# Altium PCB DB25-relay-HV-control.PcbDoc
Units mil, origin at the board's own origin, x right, y up, seen from the top; angles counter-clockwise.
Board outline 3100 x 2800 mil, 2 copper layers (Top Layer, Bottom Layer); 55 components, 50 nets, 198 pads, 0 vias.
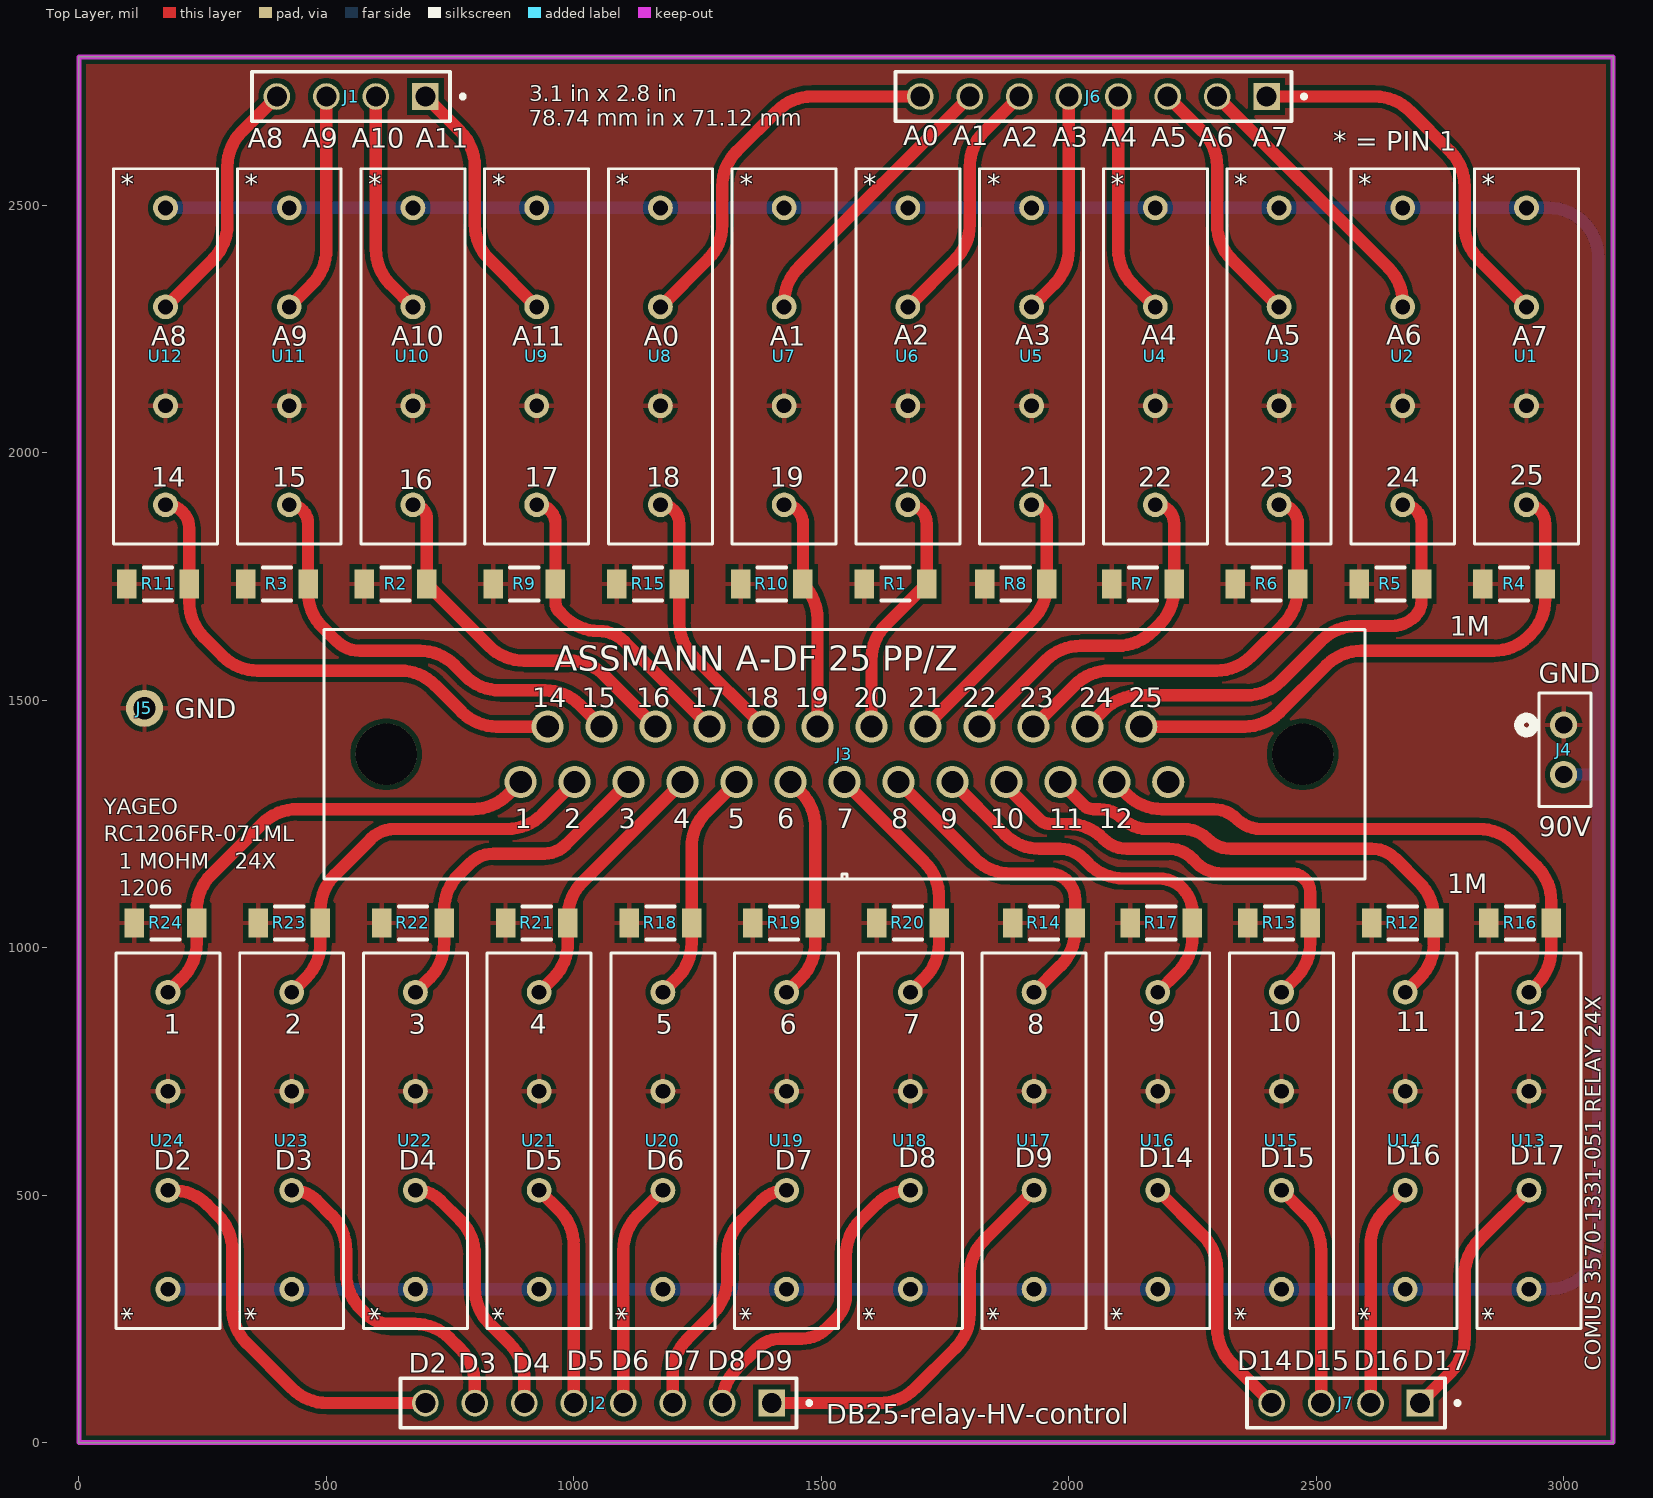
[diagram p0: Top Layer view]
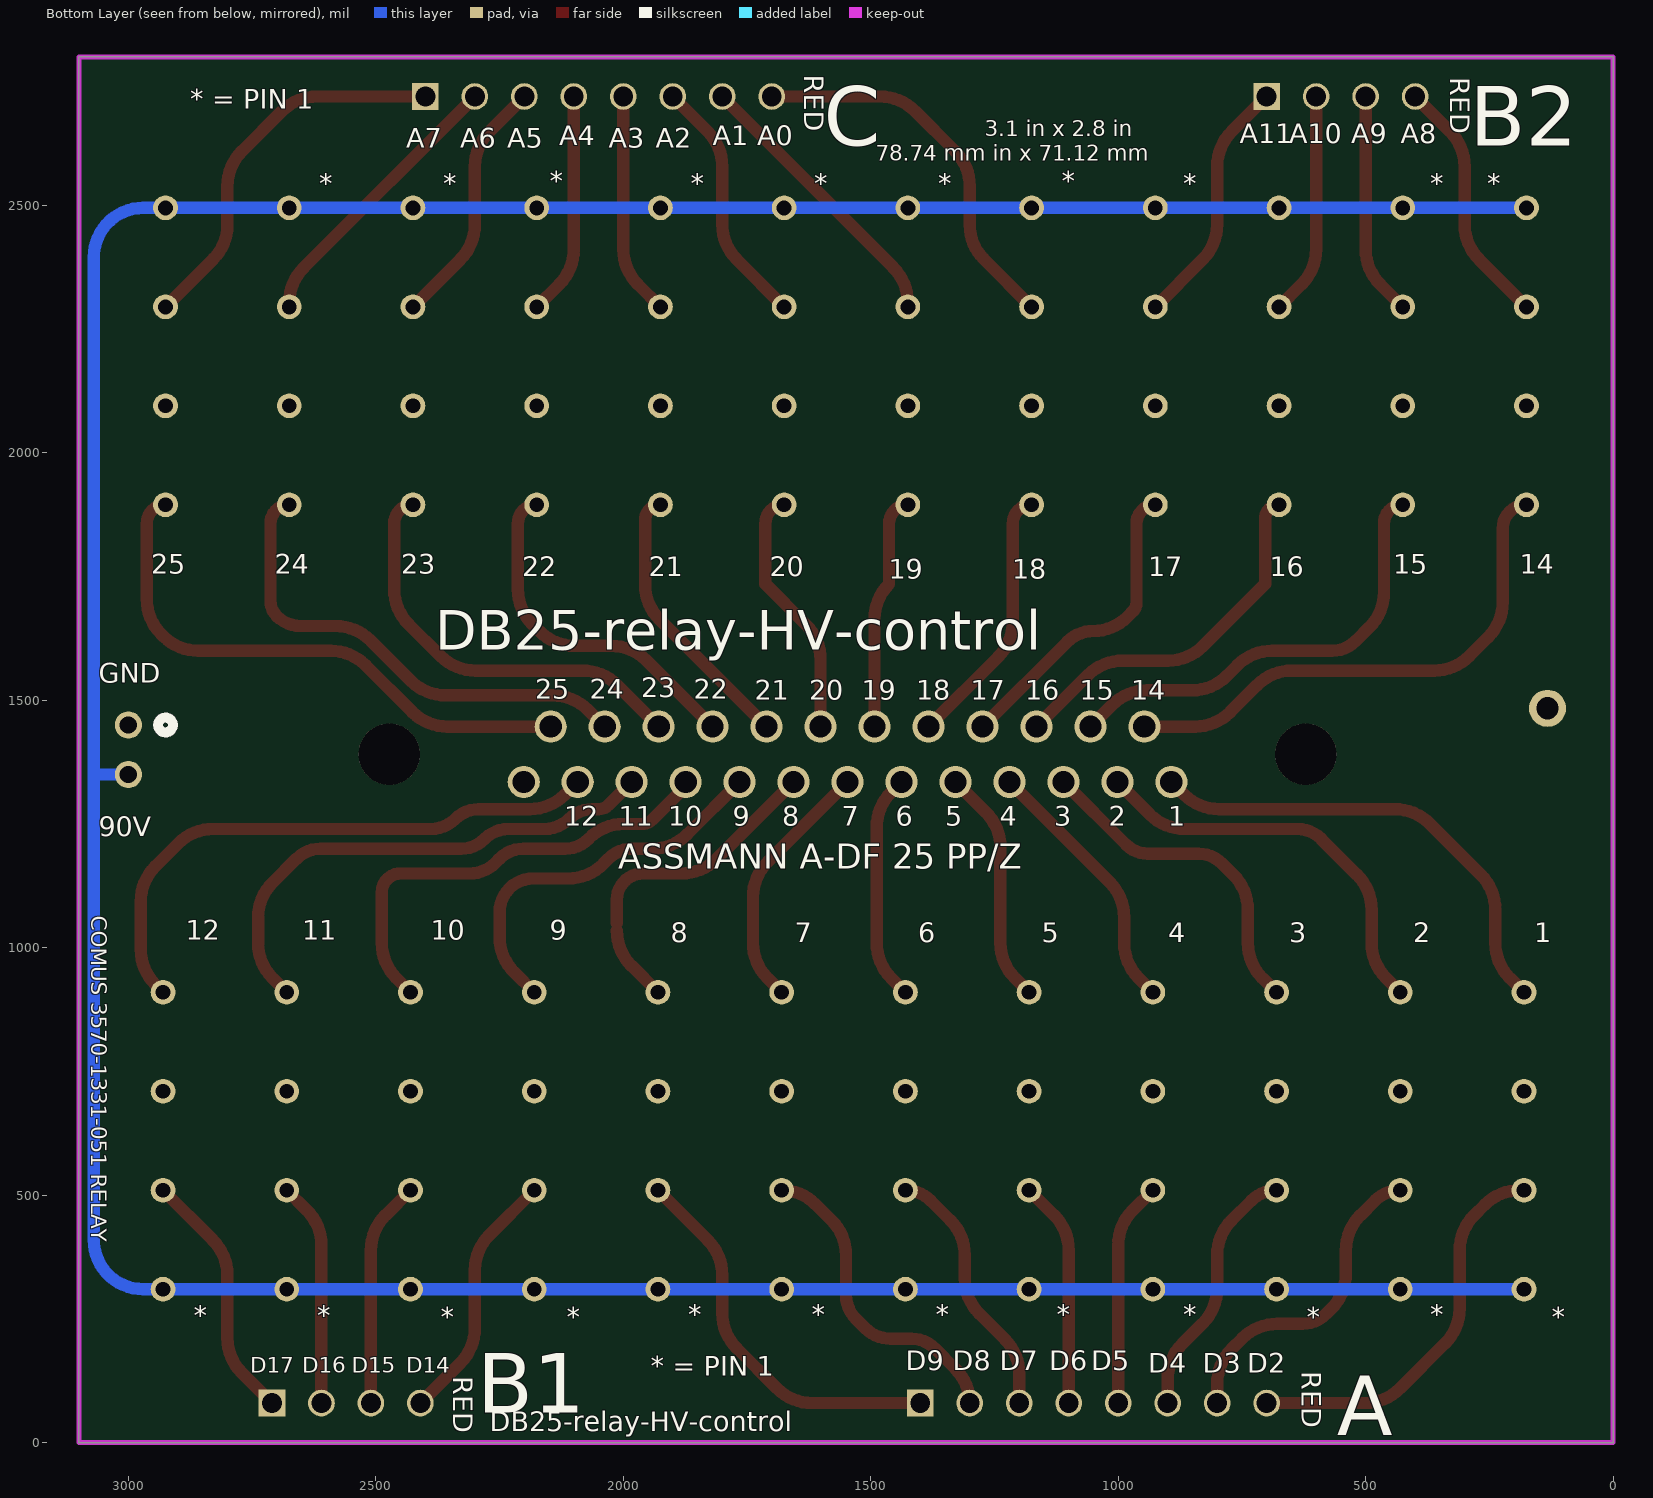
[diagram p1: Bottom Layer view, seen from below]
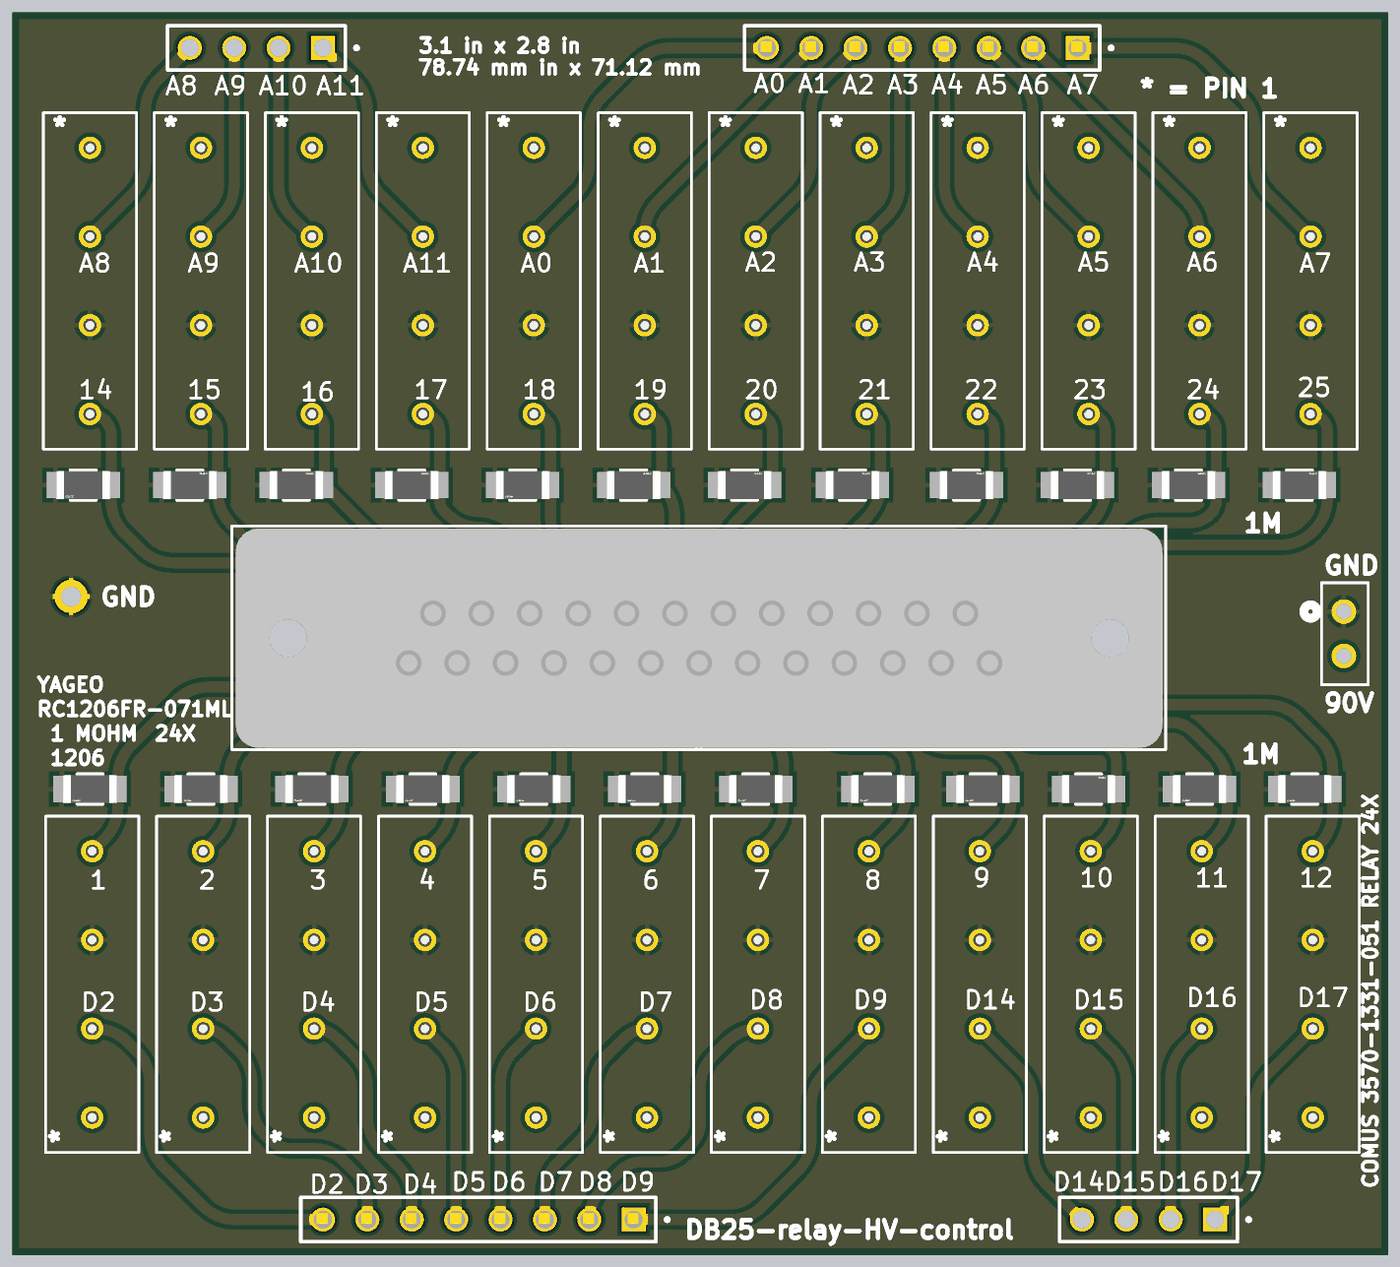
[diagram p2: 3D render of the assembled board from above, using the file's embedded part models]

## Layer stack, top to bottom
Top Solder: solder mask 0.4, Solder Resist, Dk 3.5
Top Layer: signal copper 1.4
Dielectric 1: dielectric 12.6, FR-4, Dk 4.8
Bottom Layer: signal copper 1.4
Bottom Solder: solder mask 0.4, Solder Resist, Dk 3.5

## Board outline
0,0 0,2800 3100,2800 3100,0

## Design rules (kind name [scope] priority, off if disabled: settings)
Clearance [All] p1: gap=10 ignorepadtopadclearanceinfootprint=FALSE
PolygonConnect [All] p1: connectstyle=Relief reliefconductorwidth=10 reliefentries=4 polygonreliefangle="90 Angle" airgapwidth=10
RoutingVias [All] p1: holewidth=28 width=50 viastyle="Through Hole" minholewidth=28 minwidth=50 maxholewidth=28 maxwidth=50
SolderMaskExpansion [All] p1: expansion=4 istentingtop=FALSE
Width [All] p1: maxlimit=30 minlimit=10 preferedwidth=25 minimp=50.000000 maximp=50.000000 favimp=50.000000
30 further rules are at their usual default settings.

## Components (designator, comment, footprint, x,y, rotation, side; value= is the part's Value field where it differs from the comment)
J1 "TSW-104-07-G-S" SAMTEC_TSW-104-07-G-S 550,2720 r180 top
J2 "TSW-108-07-G-S" SAMTEC_TSW-108-07-G-S 1050,80 r180 top
J3 "A-DF 25 PP/Z" "CONN_A-DF 25 PPZ_ASM" 892.56,1335 r180 top
J4 "TSW-102-07-G-S" CON2_1X2_TU_TSW 3000,1400 r270 top
J5 "Single Pin" "Single PC Pin" 132.5,1483.75 r0 top
J6 "TSW-108-07-G-S" SAMTEC_TSW-108-07-G-S 2050,2720 r180 top
J7 "TSW-104-07-G-S" SAMTEC_TSW-104-07-G-S 2560,80 r180 top
R1 "RC1206JR-070RL" FP-RC1206-MFG 1650,1735 r0 top value=0Ω
R2 "RC1206JR-070RL" FP-RC1206-MFG 640,1735 r0 top value=0Ω
R3 "RC1206JR-070RL" FP-RC1206-MFG 400,1735 r0 top value=0Ω
R4 "RC1206JR-070RL" FP-RC1206-MFG 2900,1735 r0 top value=0Ω
R5 "RC1206JR-070RL" FP-RC1206-MFG 2650,1735 r0 top value=0Ω
R6 "RC1206JR-070RL" FP-RC1206-MFG 2400,1735 r0 top value=0Ω
R7 "RC1206JR-070RL" FP-RC1206-MFG 2150,1735 r0 top value=0Ω
R8 "RC1206JR-070RL" FP-RC1206-MFG 1892.99,1735 r0 top value=0Ω
R9 "RC1206JR-070RL" FP-RC1206-MFG 900,1735 r0 top value=0Ω
R10 "RC1206JR-070RL" FP-RC1206-MFG 1400,1735 r0 top value=0Ω
R11 "RC1206JR-070RL" FP-RC1206-MFG 160,1735 r180 top value=0Ω
R12 "RC1206JR-070RL" FP-RC1206-MFG 2675,1050 r180 top value=0Ω
R13 "RC1206JR-070RL" FP-RC1206-MFG 2425,1050 r0 top value=0Ω
R14 "RC1206JR-070RL" FP-RC1206-MFG 1950,1050 r180 top value=0Ω
R15 "RC1206JR-070RL" FP-RC1206-MFG 1150,1735 r180 top value=0Ω
R16 "RC1206JR-070RL" FP-RC1206-MFG 2912.01,1050 r180 top value=0Ω
R17 "RC1206JR-070RL" FP-RC1206-MFG 2187.01,1050 r180 top value=0Ω
R18 "RC1206JR-070RL" FP-RC1206-MFG 1175,1050 r180 top value=0Ω
R19 "RC1206JR-070RL" FP-RC1206-MFG 1425,1050 r180 top value=0Ω
R20 "RC1206JR-070RL" FP-RC1206-MFG 1675,1050 r180 top value=0Ω
R21 "RC1206JR-070RL" FP-RC1206-MFG 925,1050 r180 top value=0Ω
R22 "RC1206JR-070RL" FP-RC1206-MFG 675,1050 r180 top value=0Ω
R23 "RC1206JR-070RL" FP-RC1206-MFG 425,1050 r180 top value=0Ω
R24 "RC1206JR-070RL" FP-RC1206-MFG 175,1050 r180 top value=0Ω
U1 "3570-1331-051" SIP_3570-1331_COM 2925,2495 r270 top
U2 "3570-1331-051" SIP_3570-1331_COM 2675,2495 r270 top
U3 "3570-1331-051" SIP_3570-1331_COM 2425,2495 r270 top
U4 "3570-1331-051" SIP_3570-1331_COM 2175,2495 r270 top
U5 "3570-1331-051" SIP_3570-1331_COM 1925,2495 r270 top
U6 "3570-1331-051" SIP_3570-1331_COM 1675,2495 r270 top
U7 "3570-1331-051" SIP_3570-1331_COM 1425,2495 r270 top
U8 "3570-1331-051" SIP_3570-1331_COM 1175,2495 r270 top
U9 "3570-1331-051" SIP_3570-1331_COM 925,2495 r270 top
U10 "3570-1331-051" SIP_3570-1331_COM 675,2495 r270 top
U11 "3570-1331-051" SIP_3570-1331_COM 425,2495 r270 top
U12 "3570-1331-051" SIP_3570-1331_COM 175,2495 r270 top
U13 "3570-1331-051" SIP_3570-1331_COM 2930,310 r90 top
U14 "3570-1331-051" SIP_3570-1331_COM 2680,310 r90 top
U15 "3570-1331-051" SIP_3570-1331_COM 2430,310 r90 top
U16 "3570-1331-051" SIP_3570-1331_COM 2180,310 r90 top
U17 "3570-1331-051" SIP_3570-1331_COM 1930,310 r90 top
U18 "3570-1331-051" SIP_3570-1331_COM 1680,310 r90 top
U19 "3570-1331-051" SIP_3570-1331_COM 1430,310 r90 top
U20 "3570-1331-051" SIP_3570-1331_COM 1180,310 r90 top
U21 "3570-1331-051" SIP_3570-1331_COM 930,310 r90 top
U22 "3570-1331-051" SIP_3570-1331_COM 680,310 r90 top
U23 "3570-1331-051" SIP_3570-1331_COM 430,310 r90 top
U24 "3570-1331-051" SIP_3570-1331_COM 180,310 r90 top

## Footprints (in the part's own frame and the unit in brackets; to place one, negate y for a bottom-side part, rotate by r counter-clockwise, add the part's x,y. Pads: shape width x height; smd on the part's side, far side on the other; paste and mask are expansions set on the pad)
CON2_1X2_TU_TSW [mil]
  round 55 / inner round 60 / far side round 55 hole 35 paste-99999 mask+0: 1(-50,0) 2(50,0)
  silkscreen extent -115,-90 115,55
"CONN_A-DF 25 PPZ_ASM" [mil]
  round 65 / inner round 60 / far side round 65 hole 45 paste-99999 mask+0: 1(0,0) 2(-109.06,0) 3(-218.11,0) 4(-327.17,0) 5(-436.22,0) 6(-545.28,0) 7(-654.33,0) 8(-763.39,0) 9(-872.44,0) 10(-981.5,0) 11(-1090.55,0) 12(-1199.61,0) 13(-1308.66,0) 14(-54.53,-111.81) 15(-163.58,-111.81) 16(-272.64,-111.81) 17(-381.69,-111.81) 18(-490.75,-111.81) 19(-599.8,-111.81) 20(-708.86,-111.81) 21(-817.91,-111.81) 22(-926.97,-111.81) 23(-1036.02,-111.81) 24(-1145.08,-111.81) 25(-1254.13,-111.81)
  round 124 / inner round 60 / far side round 124 hole 124 unplated paste-99999 mask-62: 26(-1580.32,-55.91) 27(271.65,-55.91)
  silkscreen extent -1706,-308 398,196, body extent -1699,-302 389,192, height 478
FP-RC1206-MFG [mm]
  rect 1x1.5 smd paste+0 mask+0: 1(-1.6,0) 2(1.6,0)
  silkscreen extent -0.72,-0.85 0.72,0.85, body extent -2.2,-0.95 2.2,0.95, height 0.25
SAMTEC_TSW-104-07-G-S [mm]
  rect 1.37x1.37 / inner round 1.37 / far side rect 1.37x1.37 hole 1.02: 01(-3.81,0)
  round 1.37 hole 1.02: 02(-1.27,0) 03(1.27,0) 04(3.81,0)
  silkscreen extent -5.83,-1.27 5.08,1.27
SAMTEC_TSW-108-07-G-S [mm]
  rect 1.37x1.37 / inner round 1.37 / far side rect 1.37x1.37 hole 1.02: 01(-8.89,0)
  round 1.37 hole 1.02: 02(-6.35,0) 03(-3.81,0) 04(-1.27,0) 05(1.27,0) 06(3.81,0) 07(6.35,0) 08(8.89,0)
  silkscreen extent -10.91,-1.27 10.16,1.27, body extent -10.25,-1.34 10.2,1.2, height 1.34
"Single PC Pin" [mil]
  round 75 hole 45: 1(0,0)
SIP_3570-1331_COM [mil]
  round 50 / inner round 60 / far side round 50 hole 30 paste-99999 mask+0: 1(0,0) 2(200,0) 3(400,0) 4(600,0)
  silkscreen extent -79,-105 679,105, body extent -74,-100 674,100, height 130

## Part data
J1 J7: "<a href=\"https://pricing.snapeda.com/parts/TSW-104-07-G-S/Samtec/view-part?ref=eda\">Check availability</a>", Package=None, Availability=Unavailable, MP=altium_native_batch, Price=None
J2 J6: "TSW - Samtec 2.54mm Pin Header 10.92mm Overall Pin Length (07) - Fast Stock", Package=None, Check_prices=https://www.snapeda.com/parts/TSW-108-07-G-S/Samtec+Inc./view-part/?ref=eda, MF="Samtec Inc.", MP=TSW-108-07-G-S, SnapEDA_Link=https://www.snapeda.com/parts/TSW-108-07-G-S/Samtec+Inc./view-part/?ref=snap
J3: library part "A-DF 25 PPZ", "No Description Available", Mfr_Name=Assmann, Copyright="Copyright (C) 2024 Ultra Librarian. All rights reserved.", Manufacturer_Part_Number="A-DF 25 PP/Z", RefDes=RefDes, Type=DEV
J4: "No Description Available", Mfr_Name="Samtec Inc", Copyright="Copyright (C) 2024 Ultra Librarian. All rights reserved.", Manufacturer_Part_Number=TSW-102-07-G-S, RefDes=RefDes, Type=DEV
J5: library part "Single PC Pin", Supplier Part Number 1=575-2617001340000, Supplier 1=Mouser
R1 R2 R3 R4 R5 R6 R7 R8 R9 R10 R11 R12 R13 R14 R15 R16 R17 R18 R19 R20 R21 R22 R23 R24: library part CMP-2100-03681-2, "RES SMD 0 OHM JUMPER 1/4W 1206", Manufacturer=YAGEO, Package=RC1206, Power Rating=0.25W, Resistance=0Ω, Temperature="-55°C to +155°C", Temperature Coefficient=300ppm/°C, Temperature Range High=+155°C, Temperature Range Low=-55°C, Tolerance=5%, Voltage Rating=200V, Automotive=No, Category=Res, ComponentLink2Description=Datasheet, ComponentLink2URL=https://www.yageo.com/upload/media/product/productsearch/datasheet/rchip/PYu-RC_Group_51_RoHS_L_10.pdf, Composition="Thick Film", Device Class L1="Passive Components", Device Class L2=Resistors, Device Class L3="Chip SMD Resistors", Digikey Description="RES SMD 0 OHM JUMPER 1/4W 1206", Footprint Url=https://www.yageo.com/upload/website/yageo_PYu-R_Mount_10_19050818_343.pdf, Height=0.65mm, Ipc Land Pattern Name=RESC310160X55, Lead Free=Yes, Manufacturer Part Number=RC1206JR-070RL, Mouser Description="Resistor: thick film; SMD; 1206; 0O; 0.25W; ±5%; -55÷155°C", Octopart=https://octopart.com/rc1206jr-070rl-yageo-40025601, RoHS=TRUE, Series=RC
U1 U2 U3 U4 U5 U6 U7 U8 U9 U10 U11 U12 U13 U14 U15 U16 U17 U18 U19 U20 U21 U22 U23 U24: "No Description Available", Mfr_Name=Comus, Copyright="Copyright (C) 2024 Ultra Librarian. All rights reserved.", Manufacturer_Part_Number=3570-1331-051, RefDes=RefDes, Type=DEV

## Nets (pads, with @x,y where several pads share a name; then routed paths per layer and width w, separated by ;. In a path a pad name is that pad's centre, name@x,y a point inside that pad or via, vN(x,y) a via of type N, cw(c..) or ccw(c..) an arc to the next point about the centre after c; other vN are vias at no path point)
GND: J4.1 J5.1 R1.1 R2.1 R3.1 R4.1 R5.1 R6.1 R7.1 R8.1 R9.1 R10.1 R11.2 R12.2 R13.1 R14.2 R15.2 R16.2 R17.2 R18.2 R19.2 R20.2 R21.2 R22.2 R23.2 R24.2 U1.3 U2.3 U3.3 U4.3 U5.3 U6.3 U7.3 U8.3 U9.3 U10.3 U11.3 U12.3 U13.3 U14.3 U15.3 U16.3 U17.3 U18.3 U19.3 U20.3 U21.3 U22.3 U23.3 U24.3
NetJ1_01: J1.01 U9.2 | length 509.6
  Top Layer w25: J1.01 770.71,2649.29 cw(c700,2578.58) 800,2578.58 800,2461.42 ccw(c900,2461.42) 829.29,2390.71 U9.2
NetJ1_02: J1.02 U10.2 | length 451.8
  Top Layer w25: J1.02 600,2411.42 ccw(c700,2411.42) 629.29,2340.71 U10.2
NetJ1_03: J1.03 U11.2 | length 451.8
  Top Layer w25: U11.2 470.71,2340.71 ccw(c400,2411.42) 500,2411.42 J1.03
NetJ1_04: J1.04 U12.2 | length 509.6
  Top Layer w25: U12.2 270.71,2390.71 ccw(c200,2461.42) 300,2461.42 300,2578.58 cw(c400,2578.58) 329.29,2649.29 J1.04
NetJ2_01: J2.01 U17.2 | length 788.9
  Top Layer w25: J2.01 1618.58,80 ccw(c1618.58,180) 1689.29,109.29 1770.71,190.71 ccw(c1700,261.42) 1800,261.42 1800,338.58 cw(c1900,338.58) 1829.29,409.29 U17.2
NetJ2_02: J2.02 U18.2 | length 647.8
  Top Layer w25: J2.02 cw(c1396.57,80) 1328.28,148.28 1370,190 cw(c1418.28,141.72) 1418.28,210 1460,210 ccw(c1460,282.43) 1511.21,231.21 1530,250 ccw(c1481.72,298.28) 1550,298.28 1550,378.58 cw(c1650,378.58) 1579.29,449.29 1611.72,481.72 cw(c1680,413.43) U18.2
NetJ2_03: J2.03 U19.2 | length 526.8
  Top Layer w25: J2.03 1200,138.58 cw(c1300,138.58) 1229.29,209.29 1280.71,260.71 ccw(c1210,331.42) 1310,331.42 1310,378.58 cw(c1410,378.58) 1339.29,449.29 1378.79,488.79 cw(c1430,437.57) U19.2
NetJ2_04: J2.04 U20.2 | length 458.8
  Top Layer w25: J2.04 1100,388.58 cw(c1200,388.58) 1129.29,459.29 U20.2
NetJ2_05: J2.05 U21.2 | length 454.7
  Top Layer w25: U21.2 970.71,469.29 cw(c900,398.58) 1000,398.58 J2.05
NetJ2_06: J2.06 U22.2 | length 522.7
  Top Layer w25: U22.2 cw(c680,437.57) 731.21,488.79 770.71,449.29 cw(c700,378.58) 800,378.58 800,311.42 ccw(c900,311.42) 829.29,240.71 870.71,199.29 cw(c800,128.58) 900,128.58 J2.06
NetJ2_07: J2.07 U23.2 | length 647.9
  Top Layer w25: U23.2 cw(c430,437.57) 481.21,488.79 510.71,459.29 cw(c440,388.58) 540,388.58 540,341.42 ccw(c640,341.42) 569.29,270.71 580,260 ccw(c628.28,308.28) 628.28,240 678.58,240 cw(c678.58,140) 749.29,210.71 770.71,189.29 cw(c700,118.58) 800,118.58 J2.07
NetJ2_08: J2.08 U24.2 | length 798.1
  Top Layer w25: U24.2 188.58,510 cw(c188.58,410) 259.29,480.71 280.71,459.29 cw(c210,388.58) 310,388.58 310,271.42 ccw(c410,271.42) 339.29,200.71 430.71,109.29 ccw(c501.42,180) 501.42,80 J2.08
NetJ3_1: J3.1 R24.1 U24.4 | length 959.3
  Top Layer w25: U24.4 208.7,938.7 ccw(c137.99,1009.41) 237.99,1009.41 R24.1 237.99,1076.57 cw(c337.99,1076.57) 267.28,1147.28 370.71,1250.71 cw(c441.42,1180) 441.42,1280 796.14,1280 ccw(c796.14,1380) 866.85,1309.29 J3.1
NetJ3_2: J3.2 R23.1 U23.4 | length 819.7
  Top Layer w25: U23.4 458.7,938.7 ccw(c387.99,1009.41) 487.99,1009.41 R23.1 487.99,1076.57 cw(c587.99,1076.57) 517.28,1147.28 590,1220 cw(c638.28,1171.72) 638.28,1240 865.19,1240 ccw(c865.19,1340) 935.9,1269.29 J3.2
NetJ3_3: J3.3 R22.1 U22.4 | length 680.4
  Top Layer w25: U22.4 708.7,938.7 ccw(c637.99,1009.41) 737.99,1009.41 R22.1 737.99,1076.57 cw(c837.99,1076.57) 767.28,1147.28 790,1170 cw(c838.28,1121.72) 838.28,1190 940,1190 ccw(c940,1251.97) 983.82,1208.15 J3.3
NetJ3_4: J3.4 R21.1 U21.4 | length 536.4
  Top Layer w25: U21.4 958.7,938.7 ccw(c887.99,1009.41) 987.99,1009.41 R21.1 987.99,1061.85 cw(c1087.99,1061.85) 1017.28,1132.56 J3.4
NetJ3_5: J3.5 R18.1 U20.4 | length 478
  Top Layer w25: U20.4 1208.7,938.7 ccw(c1137.99,1009.41) 1237.99,1009.41 R18.1 1237.99,1202.79 cw(c1337.99,1202.79) 1267.28,1273.5 J3.5
NetJ3_6: J3.6 R19.1 U19.4 | length 461.2
  Top Layer w25: U19.4 1458.7,938.7 ccw(c1387.99,1009.41) 1487.99,1009.41 R19.1 1487.99,1243.42 ccw(c1387.99,1243.42) 1458.7,1314.13 J3.6
NetJ3_7: J3.7 R20.1 U18.4 | length 519.6
  Top Layer w25: J3.7 1708.7,1173.19 cw(c1637.99,1102.48) 1737.99,1102.48 R20.1 1737.99,1009.41 cw(c1637.99,1009.41) 1708.7,938.7 U18.4
NetJ3_8: J3.8 R14.1 U17.4 | length 661.1
  Top Layer w25: J3.8 1811.66,1179.29 ccw(c1882.37,1250) 1882.37,1150 1960,1150 cw(c1960,1097.01) 2012.99,1097.01 R14.1 ; U17.4 1983.7,963.7 ccw(c1912.99,1034.41) R14.1@2012.99,1034.41
NetJ3_9: J3.9 R17.1 U16.4 | length 779.6
  Top Layer w25: J3.9 1870.71,1229.29 ccw(c1941.42,1300) 1941.42,1200 1981.72,1200 cw(c1981.72,1131.72) 2030,1180 2040.71,1169.29 ccw(c2111.42,1240) 2111.42,1140 2181.72,1140 cw(c2181.72,1071.72) 2230,1120 cw(c2181.72,1071.72) 2250,1071.72 R17.1 2250,1021.42 cw(c2150,1021.42) 2220.71,950.71 U16.4
NetJ3_10: J3.10 R13.2 U15.4 | length 923.7
  Top Layer w25: J3.10 ccw(c1895.92,1335) 1880.46,1319.54 1940,1260 ccw(c1964.14,1284.14) 1964.14,1250 2000,1250 cw(c2000,1153.43) 2068.28,1221.72 2070,1220 ccw(c2118.28,1268.28) 2118.28,1200 2201.72,1200 cw(c2201.72,1131.72) 2250,1180 2258.79,1171.21 ccw(c2310,1222.43) 2310,1150 2450,1150 cw(c2450,1112.01) 2487.99,1112.01 R13.2 2487.99,1009.41 cw(c2387.99,1009.41) 2458.7,938.7 U15.4
NetJ3_11: J3.11 R12.1 U14.4 | length 1042.9
  Top Layer w25: J3.11 2029.7,1288.41 ccw(c2050,1308.7) 2050,1280 2061.72,1280 cw(c2061.72,1211.72) 2110,1260 ccw(c2158.28,1308.28) 2158.28,1240 2231.72,1240 cw(c2231.72,1171.72) 2280,1220 ccw(c2328.28,1268.28) 2328.28,1200 2611.72,1200 cw(c2611.72,1131.72) 2660,1180 2708.7,1131.3 cw(c2637.99,1060.59) 2737.99,1060.59 R12.1 2737.99,1009.41 cw(c2637.99,1009.41) 2708.7,938.7 U14.4
NetJ3_12: J3.12 R16.1 U13.4 | length 1186.2
  Top Layer w25: J3.12 2117.88,1309.29 ccw(c2188.59,1380) 2188.59,1280 2291.72,1280 cw(c2291.72,1211.72) 2340,1260 ccw(c2388.28,1308.28) 2388.28,1240 2828.58,1240 cw(c2828.58,1140) 2899.29,1210.71 2945.71,1164.29 cw(c2875,1093.58) 2975,1093.58 R16.1 2975,996.42 cw(c2875,996.42) 2945.71,925.71 U13.4
NetJ3_14: J3.14 R11.1 U12.4 | length 1059.3
  Top Layer w25: U12.4 cw(c175,1847.01) 222.99,1847.01 R11.1 222.99,1698.43 ccw(c322.99,1698.43) 252.28,1627.72 290.71,1589.29 ccw(c361.42,1660) 361.42,1560 648.58,1560 cw(c648.58,1460) 719.29,1530.71 773.9,1476.1 ccw(c844.61,1546.81) 844.61,1446.81 J3.14
NetJ3_15: J3.15 R3.2 U11.4 | length 908
  Top Layer w25: U11.4 cw(c425,1857.01) 462.99,1857.01 R3.2 462.99,1718.43 ccw(c562.99,1718.43) 492.28,1647.72 520,1620 ccw(c568.28,1668.28) 568.28,1600 688.58,1600 cw(c688.58,1500) 759.29,1570.71 780.71,1549.29 ccw(c851.42,1620) 851.42,1520 941.53,1520 cw(c941.53,1420) 1012.24,1490.71 J3.15
NetJ3_16: J3.16 R2.2 U10.4 | length 748.9
  Top Layer w25: U10.4 cw(c675,1867.01) 702.99,1867.01 R2.2 828.7,1609.29 ccw(c899.41,1680) 899.41,1580 990.59,1580 cw(c990.59,1480) 1061.3,1550.71 J3.16
NetJ3_17: J3.17 R9.2 U9.4 | length 632
  Top Layer w25: U9.4 cw(c925,1857.01) 962.99,1857.01 R9.2 962.99,1696.92 ccw(c986.92,1696.92) 970,1680 981.72,1668.28 ccw(c1050,1736.57) 1050,1640 cw(c1050,1565.01) 1103.03,1618.04 J3.17
NetJ3_18: J3.18 R15.1 U8.4 | length 536.1
  Top Layer w25: U8.4 cw(c1175,1857.01) 1212.99,1857.01 R15.1 1212.99,1658.55 ccw(c1312.99,1658.55) 1242.28,1587.84 J3.18
NetJ3_19: J3.19 R10.2 U7.4 | length 477.7
  Top Layer w25: U7.4 cw(c1425,1857.01) 1462.99,1857.01 R10.2 1463.07,1734.92 cw(c1392.36,1664.21) 1492.36,1664.21 J3.19
NetJ3_20: J3.20 R1.2 U6.4 | length 511.8
  Top Layer w25: J3.20 1601.42,1582 cw(c1701.42,1582) 1630.71,1652.71 R1.2 1712.99,1857.01 ccw(c1675,1857.01) U6.4
NetJ3_21: J3.21 R8.2 U5.4 | length 563.3
  Top Layer w25: J3.21 1926.69,1663.03 ccw(c1855.98,1733.74) 1955.98,1733.74 R8.2 1955.98,1864.02 ccw(c1925,1864.02) U5.4
NetJ3_22: J3.22 R7.2 U4.4 | length 712.1
  Top Layer w25: J3.22 1953.43,1580.71 cw(c2024.14,1510) 2024.14,1610 2098.58,1610 ccw(c2098.58,1710) 2169.29,1639.29 2183.7,1653.7 ccw(c2112.99,1724.41) 2212.99,1724.41 R7.2 2212.99,1857.01 ccw(c2175,1857.01) U4.4
NetJ3_23: J3.23 R6.2 U3.4 | length 853
  Top Layer w25: J3.23 2012.48,1530.71 cw(c2083.19,1460) 2083.19,1560 2298.58,1560 ccw(c2298.58,1660) 2369.29,1589.29 2433.7,1653.7 ccw(c2362.99,1724.41) 2462.99,1724.41 R6.2 2462.99,1857.01 ccw(c2425,1857.01) U3.4
NetJ3_24: J3.24 R5.2 U2.4 | length 989.1
  Top Layer w25: J3.24 2071.54,1480.71 cw(c2142.25,1410) 2142.25,1510 2358.58,1510 ccw(c2358.58,1610) 2429.29,1539.29 2510.71,1620.71 cw(c2581.42,1550) 2581.42,1650 2651.72,1650 ccw(c2651.72,1718.28) 2700,1670 ccw(c2668.63,1701.37) 2712.99,1701.37 R5.2 2712.99,1857.01 ccw(c2675,1857.01) U2.4
NetJ3_25: J3.25 R4.2 U1.4 | length 1142.3
  Top Layer w25: J3.25 2355.39,1446.81 ccw(c2355.39,1546.81) 2426.1,1476.1 2520.71,1570.71 cw(c2591.42,1500) 2591.42,1600 2858.58,1600 ccw(c2858.58,1700) 2929.29,1629.29 2933.7,1633.7 ccw(c2862.99,1704.41) 2962.99,1704.41 R4.2 2962.99,1857.01 ccw(c2925,1857.01) U1.4
NetJ4_2: J4.2 U1.1 U2.1 U3.1 U4.1 U5.1 U6.1 U7.1 U8.1 U9.1 U10.1 U11.1 U12.1 U13.1 U14.1 U15.1 U16.1 U17.1 U18.1 U19.1 U20.1 U21.1 U22.1 U23.1 U24.1 | length 7954.2
  Bottom Layer w25: U12.1 U11.1 U10.1 U9.1 U8.1 U7.1 U6.1 U5.1 U4.1 U3.1 U2.1 U1.1 2970,2495 cw(c2970,2395) 3070,2395 3070,1350 ; U24.1 U23.1 U22.1 U21.1 U20.1 U19.1 U18.1 U17.1 U16.1 U15.1 U14.1 U13.1 2970,310 ccw(c2970,410) 3070,410 3070,1350 ; J4.2 3070,1350
NetJ6_01: J6.01 U1.2 | length 782
  Top Layer w25: J6.01 2618.58,2720 cw(c2618.58,2620) 2689.29,2690.71 2770.71,2609.29 cw(c2700,2538.58) 2800,2538.58 2800,2460 ccw(c2896.57,2460) 2828.28,2391.72 U1.2
NetJ6_02: J6.02 U2.2 | length 576
  Top Layer w25: J6.02 2645.71,2374.29 cw(c2575,2303.58) 2675,2303.58 U2.2
NetJ6_03: J6.03 U3.2 | length 509.6
  Top Layer w25: J6.03 2270.71,2649.29 cw(c2200,2578.58) 2300,2578.58 2300,2461.42 ccw(c2400,2461.42) 2329.29,2390.71 U3.2
NetJ6_04: J6.04 U4.2 | length 451.8
  Top Layer w25: J6.04 2100,2411.42 ccw(c2200,2411.42) 2129.29,2340.71 U4.2
NetJ6_05: J6.05 U5.2 | length 451.8
  Top Layer w25: U5.2 1970.71,2340.71 ccw(c1900,2411.42) 2000,2411.42 J6.05
NetJ6_06: J6.06 U6.2 | length 509.6
  Top Layer w25: U6.2 1770.71,2390.71 ccw(c1700,2461.42) 1800,2461.42 1800,2578.58 cw(c1900,2578.58) 1829.29,2649.29 J6.06
NetJ6_07: J6.07 U7.2 | length 576
  Top Layer w25: U7.2 1425,2303.58 cw(c1525,2303.58) 1454.29,2374.29 J6.07
NetJ6_08: J6.08 U8.2 | length 782
  Top Layer w25: U8.2 1271.72,2391.72 ccw(c1203.43,2460) 1300,2460 1300,2538.58 cw(c1400,2538.58) 1329.29,2609.29 1410.71,2690.71 cw(c1481.42,2620) 1481.42,2720 J6.08
NetJ7_01: J7.01 U13.2 | length 512.5
  Top Layer w25: J7.01 2770.71,140.71 ccw(c2700,211.42) 2800,211.42 2800,338.58 cw(c2900,338.58) 2829.29,409.29 U13.2
NetJ7_02: J7.02 U14.2 | length 454.7
  Top Layer w25: J7.02 2610,398.58 cw(c2710,398.58) 2639.29,469.29 U14.2
NetJ7_03: J7.03 U15.2 | length 458.8
  Top Layer w25: U15.2 2480.71,459.29 cw(c2410,388.58) 2510,388.58 J7.03
NetJ7_04: J7.04 U16.2 | length 516.7
  Top Layer w25: U16.2 2270.71,419.29 cw(c2200,348.58) 2300,348.58 2300,231.42 ccw(c2400,231.42) 2329.29,160.71 J7.04
pads on no net: J3.13 J3.26 J3.27

## Polygon pours and split planes (outlines as drawn)
GND on Top Layer "GND_L01_P000" (solid, pour order 0): 0,0 0,2800 3100,2800 3100,0

## Keep-outs
Keep-Out Layer:
  the board outline again, w10

## Silkscreen, mask and mechanical layers (free items; w line width, h text height)
Top Overlay:
  text "3.1 in x 2.8 in" at 910,2710 h32
  text "78.74 mm in x 71.12 mm" at 908.61,2660.88 h32
  text "A0" at 1666,2621 h40
  text "A1" at 1766,2621 h40
  text "A2" at 1866.67,2617.99 h40
  text "A3" at 1966.67,2617.99 h40
  text "A4" at 2066.67,2617.99 h40
  text "A5" at 2166.67,2617.99 h40
  text "A6" at 2261.67,2617.99 h40
  text "A7" at 2371.67,2617.99 h40
  text "A8" at 341,2616 h40
  text "A9" at 451,2616 h40
  text "A10" at 551,2616 h40
  text "A11" at 681,2616 h40
  text "* = PIN 1" at 2535,2610 h40
  text "*" at 85,2523.34 h40
  text "*" at 335,2523.34 h40
  text "*" at 585,2523.34 h40
  text "*" at 835,2523.34 h40
  text "*" at 1085,2523.34 h40
  text "*" at 1335,2523.34 h40
  text "*" at 1585,2523.34 h40
  text "*" at 1835,2523.34 h40
  text "*" at 2085,2523.34 h40
  text "*" at 2335,2523.34 h40
  text "*" at 2585,2523.34 h40
  text "*" at 2835,2523.34 h40
  text "A2" at 1646.67,2217.99 h40
  text "A3" at 1891.67,2217.99 h40
  text "A4" at 2146.67,2217.99 h40
  text "A5" at 2396.67,2217.99 h40
  text "A6" at 2641.67,2217.99 h40
  text "A8" at 146,2216 h40
  text "A9" at 391,2216 h40
  text "A10" at 631,2216 h40
  text "A11" at 876,2216 h40
  text "A0" at 1141,2216 h40
  text "A1" at 1396,2216 h40
  text "A7" at 2896,2216 h40
  text "25" at 2891,1936 h40
  text "14" at 146,1931 h40
  text "15" at 391,1931 h40
  text "17" at 901,1931 h40
  text "18" at 1146,1931 h40
  text "19" at 1396,1931 h40
  text "20" at 1646,1931 h40
  text "21" at 1901,1931 h40
  text "22" at 2141,1931 h40
  text "23" at 2386,1931 h40
  text "24" at 2641,1931 h40
  text "16" at 646,1926 h40
  text "1M" at 2770,1630 h40
  text "ASSMANN A-DF 25 PP/Z" at 960,1560 h50
  text "GND" at 2950,1535 h40
  text "14" at 916,1486 h40
  text "15" at 1016,1486 h40
  text "16" at 1126,1486 h40
  text "17" at 1236,1486 h40
  text "18" at 1346,1486 h40
  text "19" at 1446,1486 h40
  text "20" at 1566,1486 h40
  text "21" at 1676,1486 h40
  text "22" at 1786,1486 h40
  text "23" at 1901,1486 h40
  text "24" at 2021,1486 h40
  text "25" at 2121,1486 h40
  text "GND" at 193.94,1464.14 h40
  text "YAGEO" at 50,1270 h32
  text "1" at 881,1241 h40
  text "2" at 981,1241 h40
  text "3" at 1091,1241 h40
  text "4" at 1201,1241 h40
  text "5" at 1311,1241 h40
  text "6" at 1411,1241 h40
  text "7" at 1531,1241 h40
  text "8" at 1641,1241 h40
  text "9" at 1741,1241 h40
  text "10" at 1841,1241 h40
  text "11" at 1961,1241 h40
  text "12" at 2061,1241 h40
  text "90V" at 2950,1225 h40
  text "RC1206FR-071ML" at 50,1215 h32
  text "1 MOHM" at 80,1160 h32
  text "24X" at 315,1160 h32
  text "1M" at 2765,1110 h40
  text "1206" at 80,1105 h32
  text "9" at 2161,831 h40
  text "10" at 2401,831 h40
  text "11" at 2661,831 h40
  text "12" at 2896,831 h40
  text "1" at 171,826 h40
  text "2" at 416,826 h40
  text "3" at 666,826 h40
  text "4" at 911,826 h40
  text "5" at 1166,826 h40
  text "6" at 1416,826 h40
  text "7" at 1666,826 h40
  text "8" at 1916,826 h40
  text "D16" at 2641,561 h40
  text "D17" at 2891,561 h40
  text "D8" at 1656,556 h40
  text "D9" at 1891,556 h40
  text "D14" at 2141,556 h40
  text "D15" at 2386,556 h40
  text "D2" at 151,551 h40
  text "D3" at 396,551 h40
  text "D4" at 646,551 h40
  text "D5" at 901,551 h40
  text "D6" at 1146,551 h40
  text "D7" at 1406,551 h40
  text "*" at 125.66,246 h40 r90
  text "*" at 375.66,246 h40 r90
  text "*" at 625.66,246 h40 r90
  text "*" at 875.66,246 h40 r90
  text "*" at 1125.66,246 h40 r90
  text "*" at 1375.66,246 h40 r90
  text "*" at 1625.66,246 h40 r90
  text "*" at 1875.66,246 h40 r90
  text "*" at 2125.66,246 h40 r90
  text "*" at 2375.66,246 h40 r90
  text "*" at 2625.66,246 h40 r90
  text "*" at 2875.66,246 h40 r90
  text "D5" at 986,146 h40
  text "D6" at 1076,146 h40
  text "D7" at 1181,146 h40
  text "D8" at 1271,146 h40
  text "D9" at 1366,146 h40
  text "D14" at 2341,146 h40
  text "D15" at 2456,146 h40
  text "D16" at 2576,146 h40
  text "D17" at 2696,146 h40
  text "COMUS 3570-1331-051 RELAY 24X" at 3075,145 h32 r90
  text "D2" at 666,141 h40
  text "D3" at 766,141 h40
  text "D4" at 876,141 h40
  text "DB25-relay-HV-control" at 1510,38.33 h40
Bottom Overlay:
  text "RED" at 1634,2764 h40 r90
  text "RED" at 329,2759 h40 r90
  text "* = PIN 1" at 2875,2695 h40
  text "3.1 in x 2.8 in" at 1270,2640 h32
  text "A8" at 429,2626 h40
  text "A9" at 529,2626 h40
  text "A10" at 654,2626 h40
  text "A11" at 754,2626 h40
  text "A0" at 1729,2621 h40
  text "A1" at 1819,2621 h40
  text "A4" at 2129,2621 h40
  text "B2" at 290,2620 h120
  text "C" at 1595,2620 h120
  text "A2" at 1934,2616 h40
  text "A3" at 2029,2616 h40
  text "A5" at 2234,2616 h40
  text "A6" at 2329,2616 h40
  text "A7" at 2439,2616 h40
  text "78.74 mm in x 71.12 mm" at 1490,2590 h32
  text "*" at 1114,2529.34 h40
  text "*" at 2149,2529.34 h40
  text "*" at 254,2524.34 h40
  text "*" at 369,2524.34 h40
  text "*" at 869,2524.34 h40
  text "*" at 1364,2524.34 h40
  text "*" at 1614,2524.34 h40
  text "*" at 1864,2524.34 h40
  text "*" at 2364,2524.34 h40
  text "*" at 2614,2524.34 h40
  text "14" at 189,1756 h40
  text "15" at 444,1756 h40
  text "23" at 2449,1756 h40
  text "24" at 2704,1756 h40
  text "25" at 2954,1756 h40
  text "16" at 694,1751 h40
  text "17" at 939,1751 h40
  text "20" at 1704,1751 h40
  text "21" at 1949,1751 h40
  text "22" at 2204,1751 h40
  text "18" at 1214,1746 h40
  text "19" at 1464,1746 h40
  text "DB25-relay-HV-control" at 2380,1601.66 h80
  text "GND" at 3060,1535 h40
  text "23" at 1964,1506 h40
  text "22" at 1857.8,1502.97 h40
  text "24" at 2067.8,1502.97 h40
  text "25" at 2177.8,1502.97 h40
  text "14" at 974,1501 h40
  text "15" at 1077.78,1501.42 h40
  text "16" at 1187.78,1501.42 h40
  text "17" at 1297.78,1501.42 h40
  text "18" at 1407.78,1501.42 h40
  text "19" at 1517.78,1501.42 h40
  text "20" at 1624,1501 h40
  text "21" at 1734,1501 h40
  text "1" at 899,1246 h40
  text "2" at 1019,1246 h40
  text "3" at 1129,1246 h40
  text "4" at 1239,1246 h40
  text "5" at 1349,1246 h40
  text "6" at 1449,1246 h40
  text "7" at 1559,1246 h40
  text "8" at 1679,1246 h40
  text "9" at 1779,1246 h40
  text "10" at 1909,1246 h40
  text "11" at 2009,1246 h40
  text "12" at 2119,1246 h40
  text "90V" at 3060,1225 h40
  text "ASSMANN A-DF 25 PP/Z" at 2010,1160 h50
  text "COMUS 3570-1331-051 RELAY" at 3075,1065 h32 r90
  text "9" at 2149,1016 h40
  text "10" at 2389,1016 h40
  text "11" at 2649,1016 h40
  text "12" at 2884,1016 h40
  text "1" at 159,1011 h40
  text "2" at 404,1011 h40
  text "3" at 654,1011 h40
  text "4" at 899,1011 h40
  text "5" at 1154,1011 h40
  text "6" at 1404,1011 h40
  text "7" at 1654,1011 h40
  text "8" at 1904,1011 h40
  text "*" at 369,239.34 h40
  text "*" at 869,239.34 h40
  text "*" at 1124,239.34 h40
  text "*" at 1369,239.34 h40
  text "*" at 1619,239.34 h40
  text "*" at 1869,239.34 h40
  text "*" at 2618.1,237.39 h40
  text "*" at 2868.1,237.39 h40
  text "*" at 124,234.34 h40
  text "*" at 619,234.34 h40
  text "*" at 2114,234.34 h40
  text "*" at 2369,234.34 h40
  text "D5" at 1054,146 h40
  text "D6" at 1139,146 h40
  text "D7" at 1239,146 h40
  text "D8" at 1334,146 h40
  text "D9" at 1429,146 h40
  text "RED" at 629,144 h40 r90
  text "D2" at 739,141 h40
  text "D3" at 829,141 h40
  text "D4" at 939,141 h40
  text "D14" at 2439,141 h32
  text "D15" at 2549,141 h32
  text "D16" at 2649,141 h32
  text "D17" at 2754,141 h32
  text "* = PIN 1" at 1945,135 h40
  text "RED" at 2344,134 h40 r90
  text "B1" at 2295,60 h120
  text "DB25-relay-HV-control" at 2270,23.33 h40
  text "A" at 445,15 h120

## Text inside footprints (layer, text, board x,y; h text height)
J3: Mechanical 13 "*" at 1005.06,1360 h50 r180
U1: Mechanical 13 "*" at 2900,2571.5 h50 r270
U2: Mechanical 13 "*" at 2650,2571.5 h50 r270
U3: Mechanical 13 "*" at 2400,2571.5 h50 r270
U4: Mechanical 13 "*" at 2150,2571.5 h50 r270
U5: Mechanical 13 "*" at 1900,2571.5 h50 r270
U6: Mechanical 13 "*" at 1650,2571.5 h50 r270
U7: Mechanical 13 "*" at 1400,2571.5 h50 r270
U8: Mechanical 13 "*" at 1150,2571.5 h50 r270
U9: Mechanical 13 "*" at 900,2571.5 h50 r270
U10: Mechanical 13 "*" at 650,2571.5 h50 r270
U11: Mechanical 13 "*" at 400,2571.5 h50 r270
U12: Mechanical 13 "*" at 150,2571.5 h50 r270
U13: Mechanical 13 "*" at 2955,233.5 h50 r90
U14: Mechanical 13 "*" at 2705,233.5 h50 r90
U15: Mechanical 13 "*" at 2455,233.5 h50 r90
U16: Mechanical 13 "*" at 2205,233.5 h50 r90
U17: Mechanical 13 "*" at 1955,233.5 h50 r90
U18: Mechanical 13 "*" at 1705,233.5 h50 r90
U19: Mechanical 13 "*" at 1455,233.5 h50 r90
U20: Mechanical 13 "*" at 1205,233.5 h50 r90
U21: Mechanical 13 "*" at 955,233.5 h50 r90
U22: Mechanical 13 "*" at 705,233.5 h50 r90
U23: Mechanical 13 "*" at 455,233.5 h50 r90
U24: Mechanical 13 "*" at 205,233.5 h50 r90